# Altium PCB Flash Pmod.PcbDoc
Units mm, origin at the board's own origin, x right, y up, seen from the top; angles counter-clockwise.
Board outline 29.67 x 28.5 mm, 2 copper layers (Top Layer, Bottom Layer); 13 components, 15 nets, 42 pads, 53 vias.
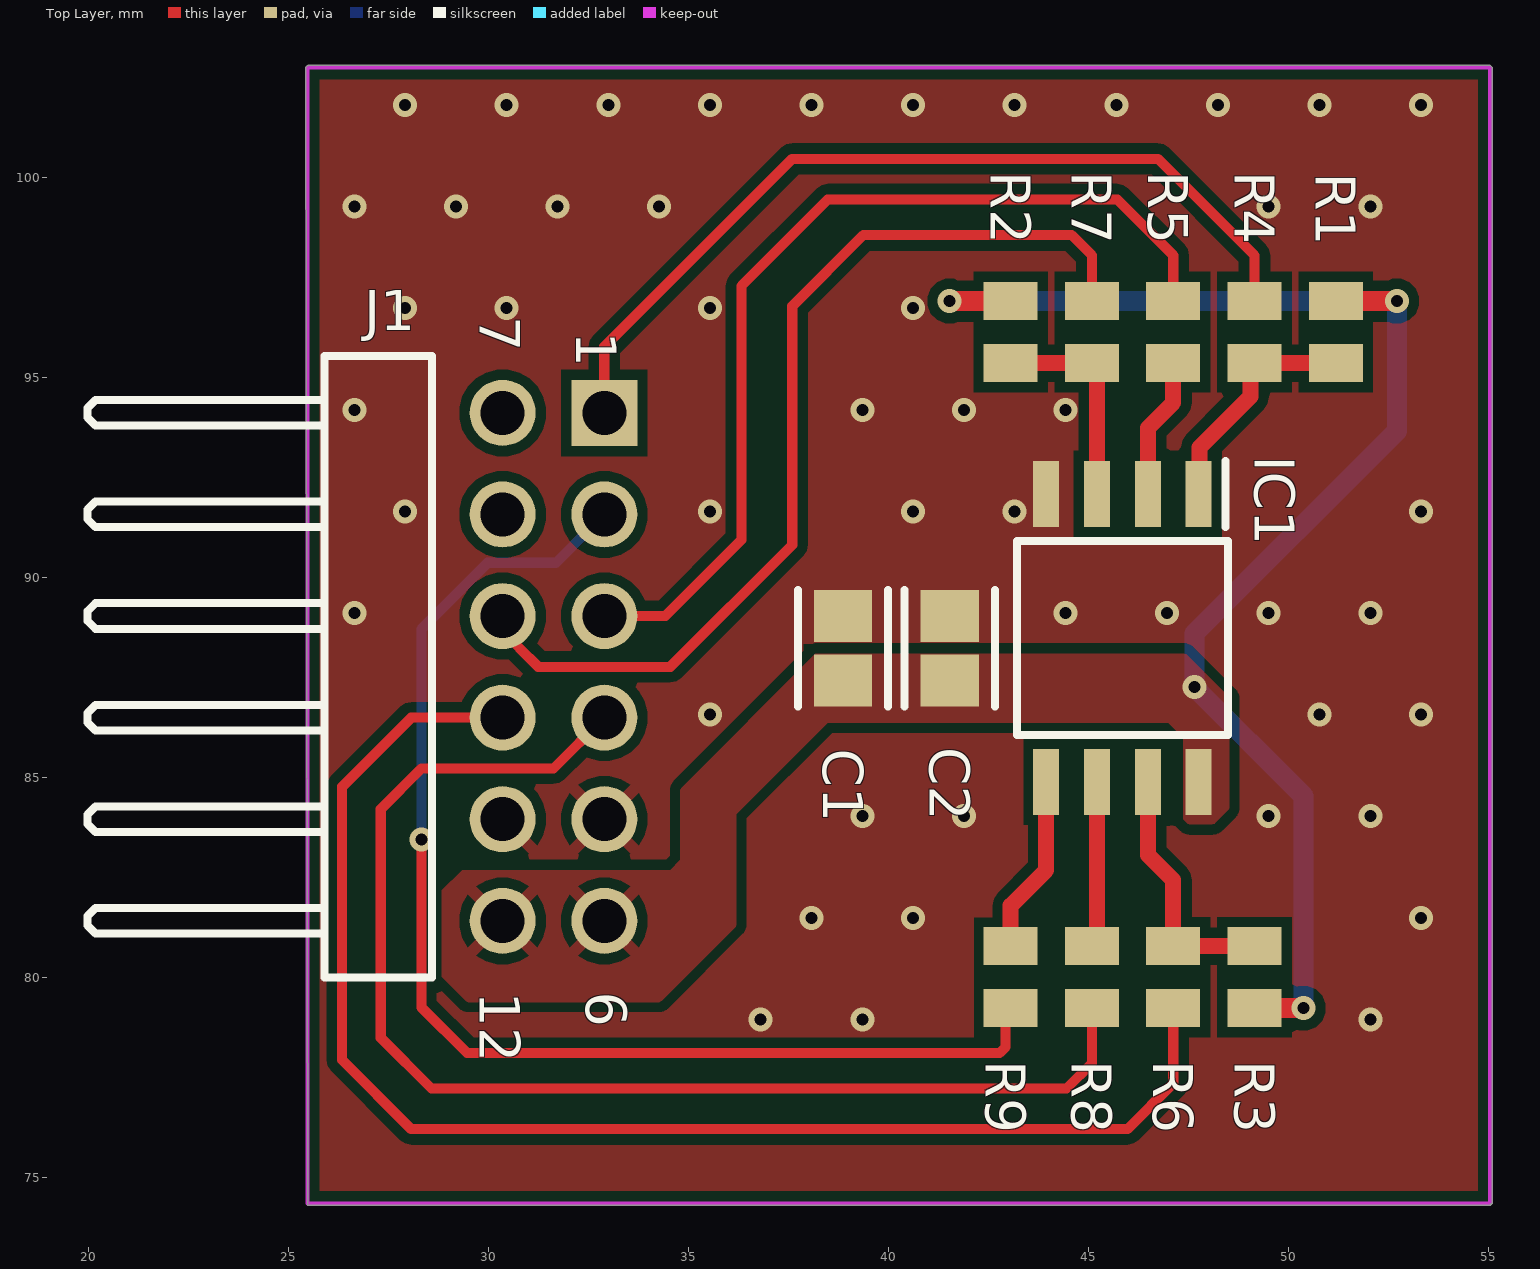
[diagram p0: Top Layer view]
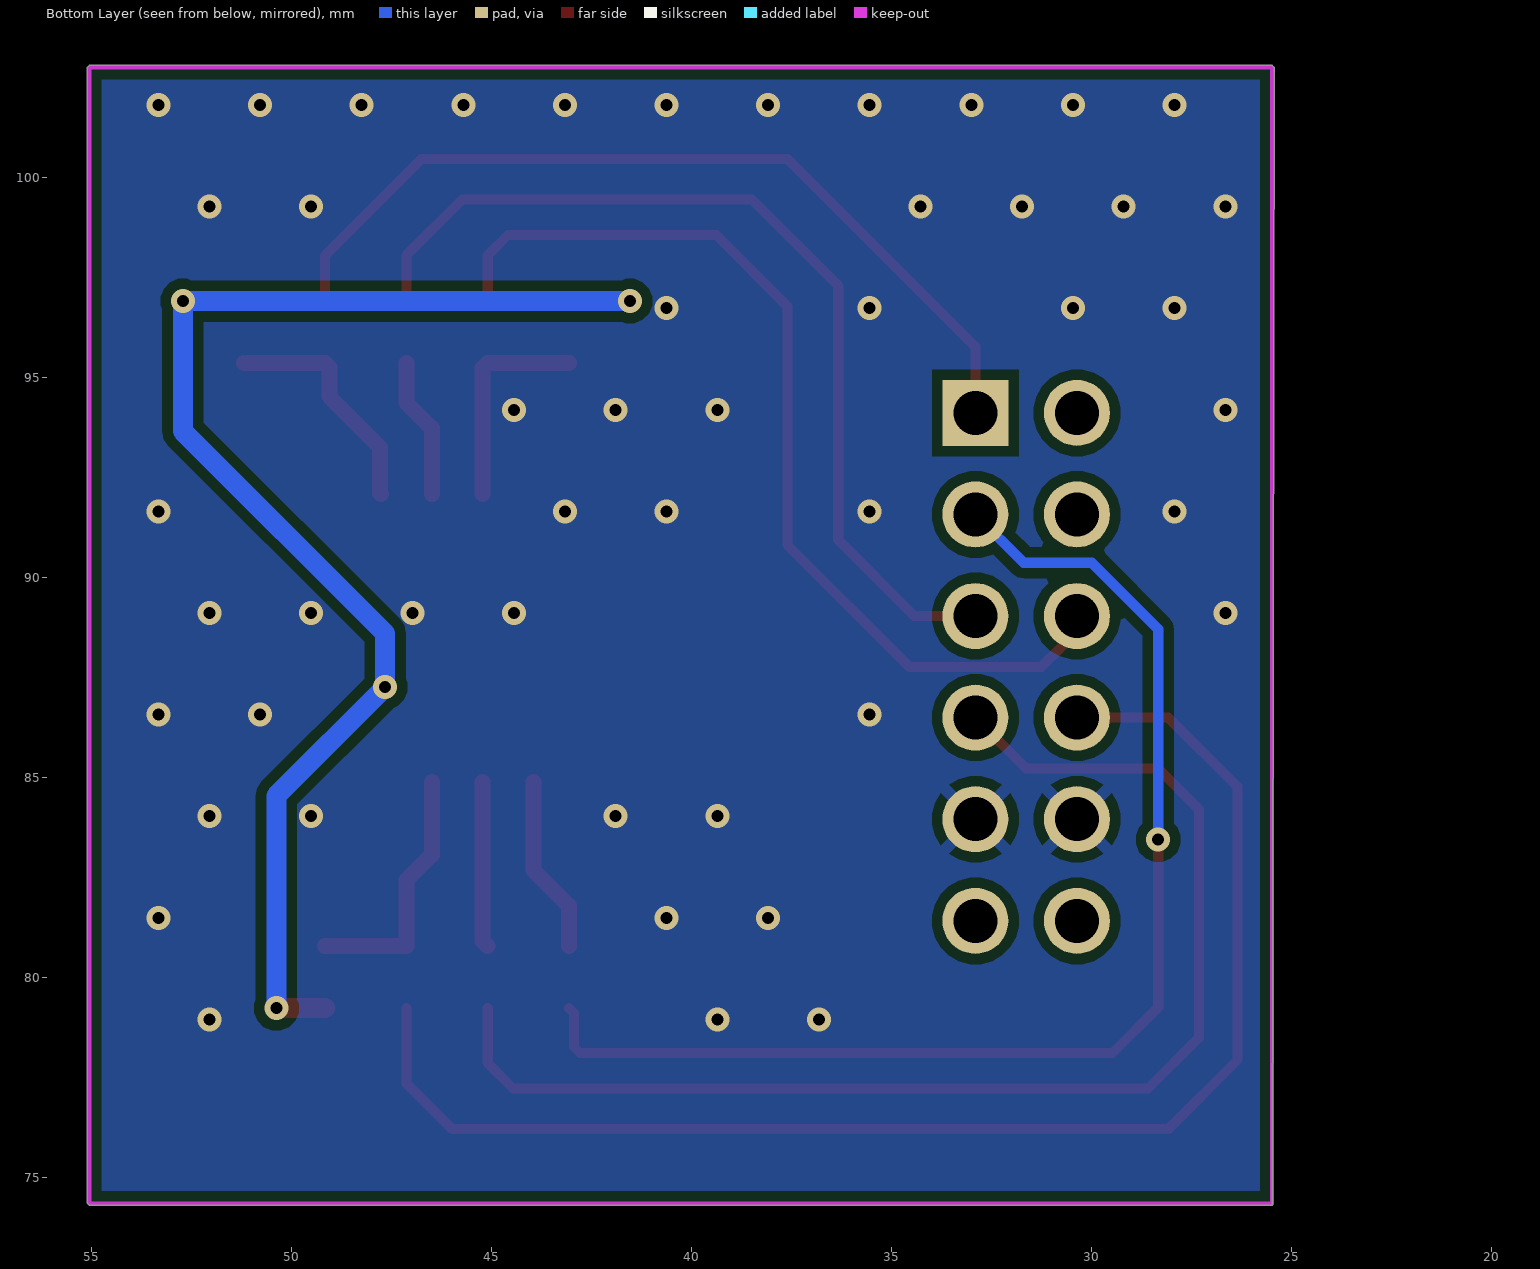
[diagram p1: Bottom Layer view, seen from below]

## Layer stack, top to bottom
Top Solder: solder mask 0.0102, Solder Resist, Dk 3.5
Top Layer: signal copper 0.0356
Dielectric 1: dielectric 0.32, FR-4, Dk 4.8
Bottom Layer: signal copper 0.0356
Bottom Solder: solder mask 0.0102, Solder Resist, Dk 3.5

## Board outline
25.476,74.295 55.042,74.295 55.092,74.346 55.092,102.743 55.042,102.793 25.476,102.793 25.426,102.743

## Design rules (kind name [scope] priority, off if disabled: settings)
Clearance [All] p1: gap=0.254 ignorepadtopadclearanceinfootprint=FALSE
PlaneConnect [All] p1: planeconnectstyle=Direct reliefexpansion=0.508 reliefentries=4 reliefconductorwidth=0.254 reliefairgap=0.254
PolygonConnect [All] p1: thpad.connectstyle=Relief thpad.reliefconductorwidth=0.3 thpad.reliefentries=4 thpad.polygonreliefangle="45 Angle" thpad.airgapwidth=0.254 smdpad.connectstyle=Direct smdpad.reliefconductorwidth=0.254 smdpad.reliefentries=4 smdpad.polygonreliefangle="90 Angle" smdpad.airgapwidth=0.254 via.connectstyle=Direct via.reliefconductorwidth=0.254 via.reliefentries=4 via.polygonreliefangle="90 Angle" via.airgapwidth=0.254
RoutingVias [All] p1: holewidth=0.6 width=0.8 viastyle="Through Hole" minholewidth=0.3 minwidth=0.6 maxholewidth=5 maxwidth=5
SolderMaskExpansion [All] p1: expansion=0.102 istentingtop=FALSE
Width [All] p1: maxlimit=5 minlimit=0.2 preferedwidth=0.4
29 further rules are at their usual default settings.

## Classes and differential pairs
component class Flash: C1 IC1 J1 R1 R2 R3 R4 R5 R6 R7 R8

## Components (designator, comment, footprint, x,y, rotation, side; value= is the part's Value field where it differs from the comment)
C1 "08051C104KAT2A" FP-0805-L_2_01_0_2-W_1_25-IPC_B 38.862,88.221 r270 top value=100nF
C2 "C0805C105K4PACTU" FP-0805-L_2_01_0_2-W_1_25-IPC_B 41.529,88.221 r270 top value=1uF
IC1 "W25Q128JV" SOIC127P790X216-8N 45.847,88.475 r270 top
J1 "61301221021" 61301221021 35.623,87.757 r90 top
R1 "RC0805FR-0710KL" RESC2013X70X40LL20T20 51.181,96.126 r270 top value=10kR
R2 "RC0805FR-0710KL" RESC2013X70X40LL20T20 43.053,96.126 r270 top value=10kR
R3 "RC0805FR-0710KL" RESC2013X70X40LL20T20 49.149,79.997 r90 top value=10kR
R4 "ERJ-P6WF47R0V" RESC2013X70X40LL20T20 49.149,96.126 r90 top value=47R
R5 "ERJ-P6WF47R0V" RESC2013X70X40LL20T20 47.117,96.126 r90 top value=47R
R6 "ERJ-P6WF47R0V" RESC2013X70X40LL20T20 47.117,79.997 r90 top value=47R
R7 "ERJ-P6WF47R0V" RESC2013X70X40LL20T20 45.085,96.126 r90 top value=47R
R8 "ERJ-P6WF47R0V" RESC2013X70X40LL20T20 45.085,79.997 r90 top value=47R
R9 "ERJ-P6WF47R0V" RESC2013X70X40LL20T20 43.053,79.997 r90 top value=47R

## Footprints (in the part's own frame and the unit in brackets; to place one, negate y for a bottom-side part, rotate by r counter-clockwise, add the part's x,y. Pads: shape width x height; smd on the part's side, far side on the other; paste and mask are expansions set on the pad)
61301221021 [mm] "Pin Header, pitch 2.54 mm, THT, Angled, dual row, 12p"
  rect 1.65x1.65 hole 1.1: 1(6.35,2.73)
  round 1.65 hole 1.1: 2(3.81,2.73) 3(1.27,2.73) 4(-1.27,2.73) 5(-3.81,2.73) 6(-6.35,2.73) 7(6.35,5.27) 8(3.81,5.27) 9(1.27,5.27) 10(-1.27,5.27) 11(-3.81,5.27) 12(-6.35,5.27)
  silkscreen extent -7.77,7.04 7.77,15.65, body extent -7.62,2.5 7.62,15.4, height 5.12
FP-0805-L_2_01_0_2-W_1_25-IPC_B [mm]
  rect 1.305x1.456 smd paste+0 mask+0: 1(-0.806,0) 2(0.806,0)
  silkscreen extent -1.46,-1.13 1.46,1.13, body extent -1.71,-0.98 1.71,0.98, height 0.25
RESC2013X70X40LL20T20 [mm] "Chip Resistor, 2-Leads, Body 2.00x1.25mm, IPC High Density"
  rect 0.95x1.35 smd: 1(-0.775,0) 2(0.775,0)
  body extent -1.1,-0.72 1.1,0.72, height 0.7
SOIC127P790X216-8N [mm]
  rect 1.65x0.65 smd: 1(-3.6,1.905) 2(-3.6,0.635) 3(-3.6,-0.635) 4(-3.6,-1.905) 5(3.6,-1.905) 6(3.6,-0.635) 7(3.6,0.635) 8(3.6,1.905)
  silkscreen extent -4.42,-2.64 2.42,2.64, body extent -3.95,-2.64 3.95,2.64, height 2.16

## Part data
C1: library part CMP-2007-04174-2, "General Purpose Ceramic Capacitor, 0805, 100nF, 10%, X7R, 15%, 100V", Capacitance=100nF, Case Code (Imperial)=0805, Case Code (Metric)=2012, Dielectric=X7R, Dielectric Material=Ceramic, Manufacturer="Kyocera AVX", Max Operating Temperature=125°C, Min Operating Temperature=-55°C, Package Quantity=2000, Supplier Part Number=478-5028-1-ND, Tolerance=10%, Voltage=100V, Voltage Rating=16V, Case/Package=0805, Category="Ceramic Capacitors", Construction=Flat, Contact Plating=Tin, Depth=1.25mm, Height=1.4mm, Lead Free="Lead Free", Length=2.01mm, Manufacturer Part Number=08051C104KAT2A, Mount="Surface Mount", Mounting Technology="Surface Mount,PCB", Number of Pins=2, Packaging="Tape and Reel", Pins=2, Pricing="1=0,14, 10=0,103, 50=0,0584, 100=0,0483, 500=0,03388, 1000=0,02805 (USD)", Radiation Hardening=No, REACH SVHC="No SVHC", Reach SVHC Compliant=No, RoHS=Yes, RoHS Compliant=Yes, Series=-, Stock=469390, Supplier=Digi-Key, Termination=SMD/SMT, Thickness=0.055inch, Voltage Rating (DC)=100V, Width=0.049inch
C2: library part CMP-2007-04174-2, "General Purpose Ceramic Capacitor, 0805, 100nF, 10%, X7R, 15%, 100V", Case Code (Imperial)=0805, Case Code (Metric)=2012, Dielectric=X5R, Dielectric Material=Ceramic, Manufacturer=KEMET, Max Operating Temperature=85°C, Min Operating Temperature=-55°C, Package Quantity=2500, Supplier Part Number=399-C0805C105K4PAC7800CT-ND, Tolerance=10%, Voltage=16V, Case/Package=0805, Category="Ceramic Capacitors", Construction=Flat, Depth=1.25mm, Dissipation Factor=5%, Height=1.25mm, Lead Free="Lead Free", Length=2mm, Manufacturer Part Number=C0805C105K4PACTU, Mounting Technology="Surface Mount,PCB", Packaging="Tape and Reel", Pricing="1=0,2, 10=0,136, 50=0,0814, 100=0,0687, 500=0,047, 1000=0,04158 (USD)", Radiation Hardening=No, Reach SVHC Compliant=No, RoHS=Yes, RoHS Compliant=Yes, Series=C0805C, Stock=66614, Supplier=Digi-Key, Termination=SMD/SMT, Thickness=0.055inch, Voltage Rating=16V, Voltage Rating (DC)=16V, Width=1.2mm
IC1: library part W25Q128JVSIM_TR, "Integrated Circuit", Arrow Part Number="W25Q128JVSIM TR", Manufacturer_Name=Winbond, Mouser Part Number=454-W25Q128JVSIMTR, Arrow Price/Stock=https://www.arrow.com/en/products/w25q128jvsimtr/winbond-electronics?region=nac, Datasheet Link=http://www.winbond.com/resource-files/w25q128jv%20dtr%20revb%2011042016.pdf, Height=2.16mm, Manufacturer_Part_Number="W25Q128JVSIM TR", Mouser Price/Stock=https://www.mouser.co.uk/ProductDetail/Winbond/W25Q128JVSIM-TR?qs=qSfuJ%252Bfl%2Fd6ji9IuruL6Zg%3D%3D
J1: library part CMP-1502-01087-1, "THT Angled Pin Header WR-PHD, Pitch 2.54 mm, Dual Row, 12 pins", Contact Resistance=20mOhm, Flammability Rating="UL94 V-0", Insulation Color=Black, Manufacturer="Wurth Electronics", Max Operating Temperature=105°C, Min Operating Temperature=-40°C, Operating Temperature=-40to105degC, Rated Current=3A, Supplier Part Number=732-5354-ND, Voltage Rating=250V, Withstanding Voltage=500VAC, Working Voltage=250VAC, Category=Connectors, ComponentLink1Description=http://www.farnell.com/cad/1737270.pdf?src-supplier=Element14, ComponentLink1URL=http://www.farnell.com/cad/1737270.pdf?src-supplier=Element14, ComponentLink2Description=https://katalog.we-online.de/em/datasheet/6130xx21021.pdf?src-supplier=Digi-Key, ComponentLink2URL=https://katalog.we-online.de/em/datasheet/6130xx21021.pdf?src-supplier=Digi-Key, Connector Type=Header, Contact Finish - Mating=GOLD, Contact Material="Copper Alloy,Copper", Contact Plating=Gold, Contact Shape=Square, Contact Type="Male Pin", Datasheet URL=https://katalog.we-online.de/em/datasheet/6130xx21021.pdf, Fastening Type=Pull, Gender=Male, Insulation Material=Nylon, Manufacturer Part Number=61301221021, Manufacturer URL=http://www.we-online.de, Mounting Technology=THT, Number of Contacts=12, Number of Positions=12, Number of Rows=2, Orientation=Angled, Package Reference=61301221021, Packaging=Bag, Part Number=61301221021, Pin Number=12, Pitch=2.54mm, Pricing="1=0,96, 10=0,817, 25=0,6812, 50=0,568, 100=0,516, 1000=0,469 (USD)", Publisher=WurthElektronik, Reach SVHC Compliant=Unknown, RoHS=Yes, RoHS Compliant=Yes, Row Number=Dual, Series=WR-PHD, Stock=2535, Supplier=Digi-Key, Termination=Solder
R1 R2 R3: library part CMP-2001-00486-1, "10 kOhms ±1% 0.125W, 1/8W Chip Resistor 0805 (2012 Metric) Moisture Resistant Thick Film", Case Code (Imperial)=0805, Case Code (Metric)=2012, Manufacturer=Yageo, Max Operating Temperature=155°C, Max Power Dissipation=125mW, Min Operating Temperature=-55°C, Package Quantity=1, Resistance Tolerance=1%, Resistor Type="Thick Film", Supplier Part Number=311-10.0KCRCT-ND, Temperature Coefficient=100ppm/°C, Voltage Rating=150V, Case/Package=0805, Category="Chip SMD Resistors", ComponentLink1Description=https://datasheet.ciiva.com/11808/0900766b8106beab-11808151.pdf?src-supplier=Rs, ComponentLink1URL=https://datasheet.ciiva.com/11808/0900766b8106beab-11808151.pdf?src-supplier=Rs, ComponentLink2Description=https://datasheet.ciiva.com/46447/444164-46447563.pdf?src-supplier=Element14, ComponentLink2URL=https://datasheet.ciiva.com/46447/444164-46447563.pdf?src-supplier=Element14, ComponentLink3Description=https://datasheet.ciiva.com/2456/pyu-r-int-thick-7-2456973.pdf?src-supplier=Digi-Key, ComponentLink3URL=https://datasheet.ciiva.com/2456/pyu-r-int-thick-7-2456973.pdf?src-supplier=Digi-Key, ComponentLink4Description=https://datasheet.ciiva.com/2456/pyu-r-int-thick-7-2456974.pdf?src-supplier=Digi-Key, ComponentLink4URL=https://datasheet.ciiva.com/2456/pyu-r-int-thick-7-2456974.pdf?src-supplier=Digi-Key, ComponentLink5Description=https://datasheet.ciiva.com/2456/pyu-r-int-thick-7-2456972.pdf?src-supplier=Digi-Key, ComponentLink5URL=https://datasheet.ciiva.com/2456/pyu-r-int-thick-7-2456972.pdf?src-supplier=Digi-Key, ComponentLink6Description=https://datasheet.ciiva.com/12669/rc0805-12669688.pdf?src-supplier=Mouser, ComponentLink6URL=https://datasheet.ciiva.com/12669/rc0805-12669688.pdf?src-supplier=Mouser, ComponentLink7Description=https://datasheet.ciiva.com/16747/rc0805-16747087.pdf?src-supplier=Future+Electronics, ComponentLink7URL=https://datasheet.ciiva.com/16747/rc0805-16747087.pdf?src-supplier=Future+Electronics, Construction=Rectangular, Depth=1.25mm, Features="Moisture Resistant", Height=0.024inch, Lead Free="Lead Free", Length=0.079inch, Manufacturer Part Number=RC0805FR-0710KL, Military Standard=Not, Number of Terminations=2, Packaging="Tape and Reel", Power Rating=125mW, Pricing="1=0,1, 10=0,027, 50=0,017, 100=0,0143, 500=0,00986, 1000=0,00852 (USD)", Reach SVHC Compliant=Unknown, RoHS=Yes, RoHS Compliant=Yes, Series=RC, Stock=9862859, Supplier=Digi-Key, Technology="THICK FILM", Termination=SMD/SMT, Tolerance=1%, Width=0.049inch
R4 R5 R6 R7 R8 R9: library part CMP-2001-00486-1, "47 Ohms ±1% 0.5W, 1/2W Chip Resistor 0805 (2012 Metric) Automotive AEC-Q200, Pulse Withstanding Thick Film", Case Code (Imperial)=0805, Case Code (Metric)=2012, Manufacturer=Panasonic, Max Operating Temperature=155°C, Max Power Dissipation=500mW, Min Operating Temperature=-55°C, Ratings=AEC-Q200, Resistance Tolerance=1%, Resistor Type="Thick Film", Supplier Part Number=P16869CT-ND, Temperature Coefficient=200ppm/°C, Voltage Rating=150V, Case/Package=0805, Category="Chip SMD Resistors", ComponentLink1Description=https://datasheet.ciiva.com/48536/erjp-series-eng-tds-48536489.pdf?src-supplier=Distrelec, ComponentLink1URL=https://datasheet.ciiva.com/48536/erjp-series-eng-tds-48536489.pdf?src-supplier=Distrelec, ComponentLink2Description=https://datasheet.ciiva.com/6082/1790600-6082415.pdf?src-supplier=Farnell, ComponentLink2URL=https://datasheet.ciiva.com/6082/1790600-6082415.pdf?src-supplier=Farnell, ComponentLink3Description=https://datasheet.ciiva.com/7886/1790600-7886918.pdf?src-supplier=Element14, ComponentLink3URL=https://datasheet.ciiva.com/7886/1790600-7886918.pdf?src-supplier=Element14, ComponentLink4Description=https://datasheet.ciiva.com/48531/aoa0000ce4-48531642.pdf?src-supplier=Avnet, ComponentLink4URL=https://datasheet.ciiva.com/48531/aoa0000ce4-48531642.pdf?src-supplier=Avnet, Depth=1.25mm, Features="Automotive AEC-Q200", Height=0.65mm, Length=2mm, Manufacturer Part Number=ERJ-P6WF47R0V, Number of Terminations=2, Packaging="Cut Tape", Power Rating=500mW, Pricing="1=0,57, 10=0,438, 50=0,2474, 100=0,184, 500=0,13326, 1000=0,10153 (USD)", Reach SVHC Compliant=No, RoHS=Yes, RoHS Compliant=Yes, Series=ERJ, Stock=32493, Supplier=Digi-Key, Technology="THICK FILM", Termination=Flat, Tolerance=1%, Voltage Rating (DC)=150V

## Via types
v1: diameter 0.6, hole 0.3, Top Layer to Bottom Layer, tented both sides, 53 vias

## Nets (pads, with @x,y where several pads share a name; then routed paths per layer and width w, separated by ;. In a path a pad name is that pad's centre, name@x,y a point inside that pad or via, vN(x,y) a via of type N, cw(c..) or ccw(c..) an arc to the next point about the centre after c; other vN are vias at no path point)
+3V3: C1.2 C2.2 IC1.8 J1.6 J1.12 R1.1 R2.1 R3.1 | length 36.3
  Top Layer w0.5: v1(41.529,96.901) R2.1 ; R3.1 v1(50.368,79.223) ; R1.1 v1(52.705,96.901)
  Bottom Layer w0.5: v1(41.529,96.901) v1(52.705,96.901) 52.705,93.65 47.65,88.595 v1(47.65,87.249) 50.368,84.531 v1(50.368,79.223)
FLASH_CLK: J1.4 R8.1 | length 32.2
  Top Layer w0.254: J1.4 31.623,85.217 28.321,85.217 27.305,84.201 27.305,78.486 28.575,77.216 44.45,77.216 45.085,77.851 R8.1
FLASH_CS: J1.1 R4.2 | length 22
  Top Layer w0.254: J1.1 32.893,95.758 37.592,100.457 46.736,100.457 49.149,98.044 R4.2
FLASH_IO0: J1.2 R9.1 | length 31.4
  Top Layer w0.254: v1(28.321,83.439) 28.321,79.248 29.464,78.105 42.777,78.105 42.926,78.254 42.926,79.095 R9.1
  Bottom Layer w0.254: v1(28.321,83.439) 28.321,88.701 29.981,90.361 31.687,90.361 J1.2
FLASH_IO1: J1.3 R5.2 | length 24
  Top Layer w0.254: J1.3 34.417,89.027 36.322,90.932 36.322,97.282 38.481,99.441 45.72,99.441 47.117,98.044 R5.2
FLASH_IO2: J1.9 R7.2 | length 24.8
  Top Layer w0.254: J1.9 30.353,88.649 30.761,88.241 30.761,88.238 31.242,87.757 34.544,87.757 37.592,90.805 37.592,96.774 39.37,98.552 44.577,98.552 45.085,98.044 R7.2
FLASH_IO3: J1.10 R6.1 | length 35.4
  Top Layer w0.254: J1.10 28.067,86.487 26.339,84.759 26.339,77.928 28.067,76.2 45.974,76.2 47.117,77.343 R6.1
FLASH_RST: J1.8
GND: C1.1 C2.1 IC1.4 J1.5 J1.11
  other v1: 36.805,78.943 39.345,78.943 52.045,78.943 38.075,81.483 40.615,81.483 53.315,81.483 39.345,84.023 41.885,84.023 49.505,84.023 52.045,84.023 35.535,86.563 50.775,86.563 53.315,86.563 26.645,89.103 44.425,89.103 46.965,89.103 49.505,89.103 52.045,89.103 27.915,91.643 35.535,91.643 40.615,91.643 43.155,91.643 53.315,91.643 26.645,94.183 39.345,94.183 41.885,94.183 44.425,94.183 27.915,96.723 30.455,96.723 35.535,96.723 40.615,96.723 26.645,99.263 29.185,99.263 31.725,99.263 34.265,99.263 49.505,99.263 52.045,99.263 27.915,101.803 30.455,101.803 32.995,101.803 35.535,101.803 38.075,101.803 40.615,101.803 43.155,101.803 45.695,101.803 48.235,101.803 50.775,101.803 53.315,101.803
NetIC1_1: IC1.1 R1.2 R4.1 | length 5.9
  Top Layer w0.4: IC1.1 47.78,92.103 47.78,93.246 49.044,94.51 49.044,95.246 R4.1 R1.2
NetIC1_2: IC1.2 R5.1 | length 3.5
  Top Layer w0.4: IC1.2 46.482,93.726 47.117,94.361 R5.1
NetIC1_3: IC1.3 R2.2 R7.1 | length 5.4
  Top Layer w0.4: R2.2 R7.1 45.212,95.224 IC1.3
NetIC1_5: IC1.5 R9.2 | length 4.5
  Top Layer w0.4: R9.2 43.053,81.788 43.942,82.677 IC1.5
NetIC1_6: IC1.6 R8.2 | length 4.2
  Top Layer w0.4: R8.2 45.212,80.899 IC1.6
NetIC1_7: IC1.7 R3.2 R6.2 | length 6.4
  Top Layer w0.4: IC1.7 46.482,83.058 47.117,82.423 R6.2 R3.2
pads on no net: J1.7

## Polygon pours and split planes (outlines as drawn)
GND on Top Layer "GND_L01_P002" (solid, remove dead copper, pour order 2): 24.486,102.743 24.486,74.295 55.118,74.295 55.067,74.346 55.067,102.794
+3V3 on Top Layer "+3V3_L01_P001" (solid, pour order 1): 28.829,82.169 28.829,80.01 29.464,79.375 34.29,79.375 36.195,81.28 36.195,84.074 38.481,86.36 46.99,86.36 47.371,85.979 47.371,83.947 47.498,83.82 48.133,83.82 48.514,84.201 48.514,86.995 47.422,88.087 38.176,88.087 34.798,84.709 34.798,82.931 34.544,82.677 34.29,82.677 29.337,82.677 34.29,82.677 29.337,82.677
GND on Bottom Layer "GND_L02_P004" (solid, remove dead copper, pour order 4): 24.536,102.87 24.536,74.422 55.169,74.422 55.118,74.473 55.118,102.921

## Keep-outs
Keep-Out Layer:
  lines w0.1: 25.476,74.346 25.476,102.743 55.042,102.743 55.042,74.346 25.476,74.346

## Text inside footprints (layer, text, board x,y; h text height)
J1: Top Overlay "6" at 32.448,79.629 h1.02 r270; Top Overlay "12" at 29.781,79.629 h1.02 r270; Top Overlay "7" at 29.781,96.52 h1.02 r270; Top Overlay "1" at 32.194,96.139 h1.02 r270